# Altium PCB LED-DRIVER.PcbDoc
Units mil, origin at the board's own origin, x right, y up, seen from the top; angles counter-clockwise.
Board outline 2220 x 1060 mil, 2 copper layers (Top Layer, Bottom Layer); 38 components, 32 nets, 104 pads, 4 vias.
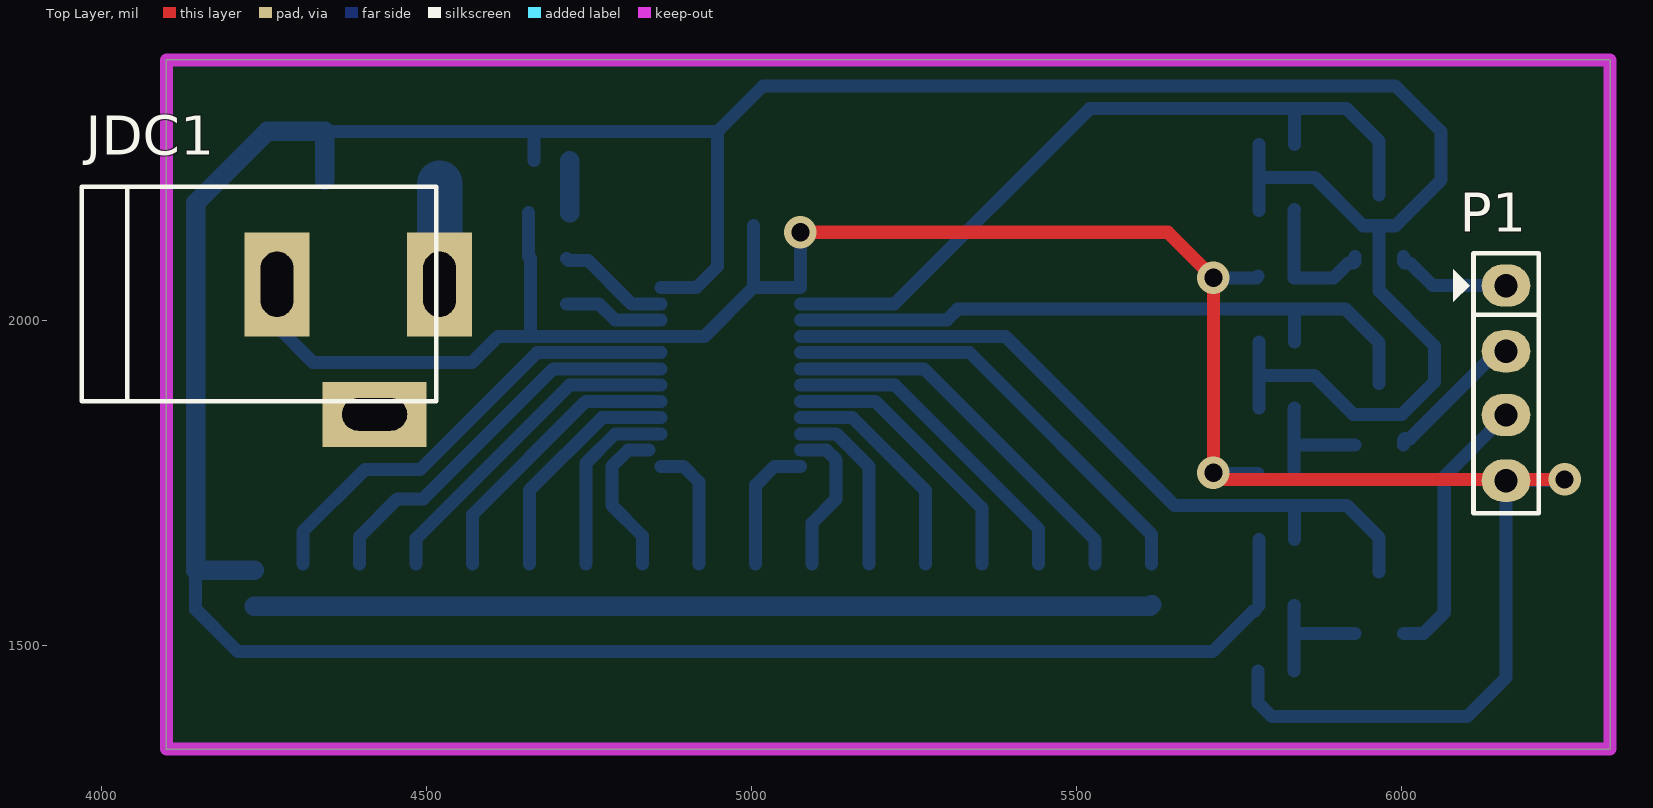
[diagram p0: Top Layer view]
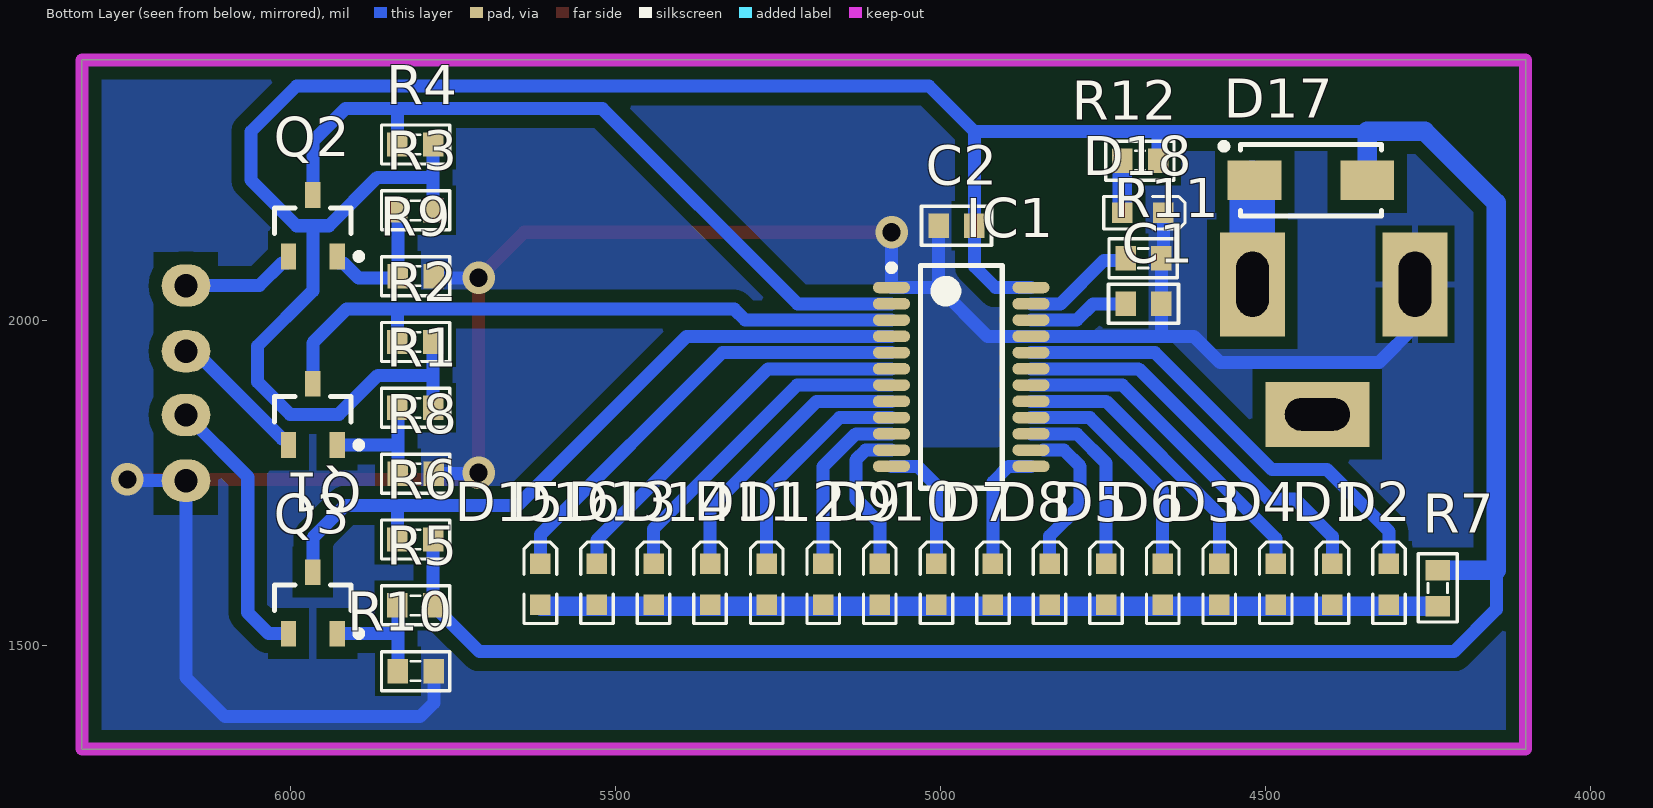
[diagram p1: Bottom Layer view, seen from below]
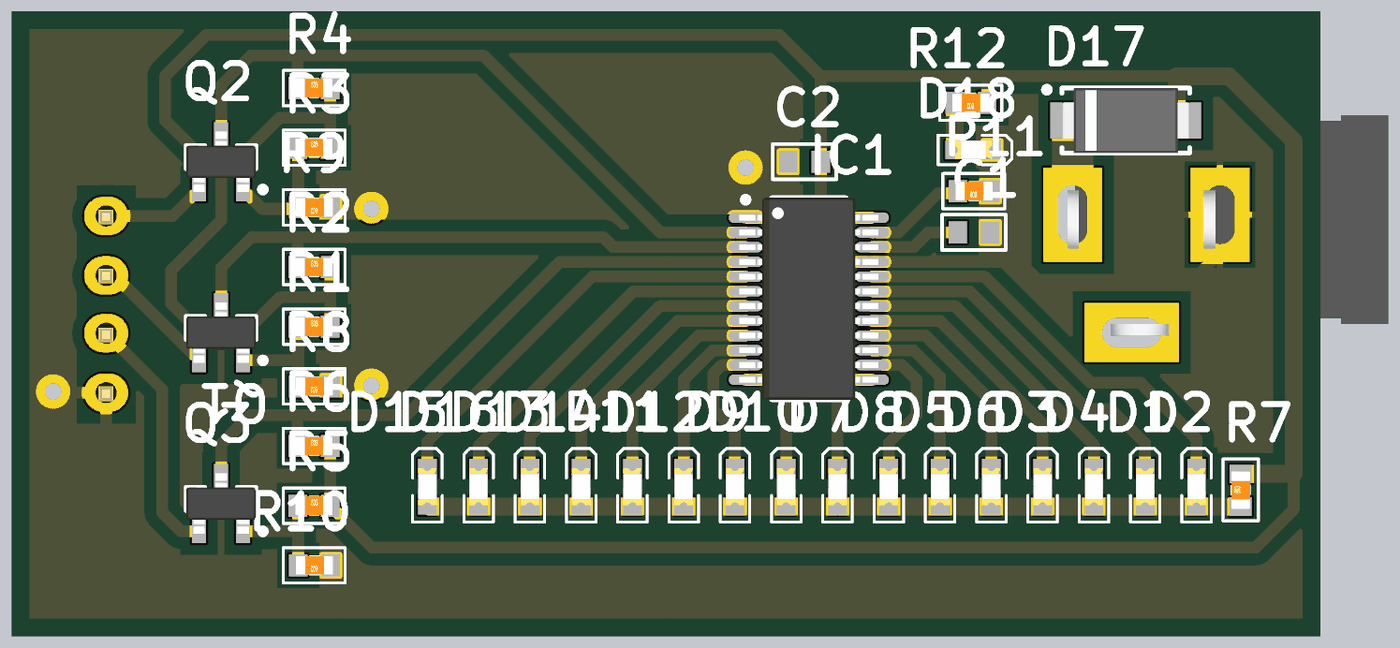
[diagram p2: 3D render of the assembled board from below, using the file's embedded part models]

## Layer stack, top to bottom
Top Solder: solder mask 0.4, Solder Resist, Dk 3.5
Top Layer: signal copper 1.4
Dielectric 1: dielectric 12.6, FR-4, Dk 4.8
Bottom Layer: signal copper 1.4
Bottom Solder: solder mask 0.4, Solder Resist, Dk 3.5

## Board outline
4100,1340 4100,2400 6320,2400 6320,1340

## Design rules (kind name [scope] priority, off if disabled: settings)
Clearance Clearance_13 [InNamedPolygon('GND_L02_P002')] p1: gap=20 ignorepadtopadclearanceinfootprint=FALSE
Clearance Clearance_12 [InNamedPolygon('GND_L02_P002')] p2: gap=15 ignorepadtopadclearanceinfootprint=FALSE
Clearance Clearance_11 [InNamedPolygon('GND_L02_P002')] p3: gap=20 ignorepadtopadclearanceinfootprint=FALSE
Clearance Clearance_10 [InNamedPolygon('NONET_L01_P002')] p4: gap=20 ignorepadtopadclearanceinfootprint=FALSE
Clearance Clearance_9 [InNamedPolygon('GND_L02_P000')] p5: gap=20 ignorepadtopadclearanceinfootprint=FALSE
Clearance Clearance_8 [InNamedPolygon('GND_L02_P000')] p6: gap=15 ignorepadtopadclearanceinfootprint=FALSE
Clearance Clearance_7 [InNamedPolygon('GND_L02_P000')] p7: gap=15 ignorepadtopadclearanceinfootprint=FALSE
Clearance Clearance_6 [InNamedPolygon('NONET_L01_P000')] p8: gap=15 ignorepadtopadclearanceinfootprint=FALSE
Clearance Clearance_5 [InNamedPolygon('GND_L02_P000')] p9: gap=15 ignorepadtopadclearanceinfootprint=FALSE
Clearance Clearance_4 [InNamedPolygon('GND_L02_P000')] p10: gap=15 ignorepadtopadclearanceinfootprint=FALSE
Clearance Clearance_3 [InNamedPolygon('GND_L02_P000')] p11: gap=15 ignorepadtopadclearanceinfootprint=FALSE
Clearance Clearance_2 [InNamedPolygon('GND_L02_P000')] p12: gap=20 ignorepadtopadclearanceinfootprint=FALSE
Clearance Clearance_1 [InNamedPolygon('GND_L02_P000')] p13: gap=10 ignorepadtopadclearanceinfootprint=FALSE
Clearance [All] p14: gap=5 ignorepadtopadclearanceinfootprint=FALSE
PolygonConnect PolygonConnect_9 [All vs IsNamedPolygon('GND_L02_P002')] p1: thpad.connectstyle=Relief thpad.reliefconductorwidth=10 thpad.reliefentries=4 thpad.polygonreliefangle="90 Angle" thpad.airgapwidth=10 smdpad.connectstyle=Direct smdpad.reliefconductorwidth=10 smdpad.reliefentries=4 smdpad.polygonreliefangle="90 Angle" smdpad.airgapwidth=10 via.connectstyle=Direct via.reliefconductorwidth=10 via.reliefentries=4 via.polygonreliefangle="90 Angle" via.airgapwidth=10
PolygonConnect PolygonConnect_8 [All vs IsNamedPolygon('NONET_L01_P002')] p2: thpad.connectstyle=Relief thpad.reliefconductorwidth=10 thpad.reliefentries=4 thpad.polygonreliefangle="90 Angle" thpad.airgapwidth=10 smdpad.connectstyle=Direct smdpad.reliefconductorwidth=10 smdpad.reliefentries=4 smdpad.polygonreliefangle="90 Angle" smdpad.airgapwidth=10 via.connectstyle=Direct via.reliefconductorwidth=10 via.reliefentries=4 via.polygonreliefangle="90 Angle" via.airgapwidth=10
PolygonConnect PolygonConnect_7 [All vs IsNamedPolygon('GND_L02_P000')] p3: thpad.connectstyle=Relief thpad.reliefconductorwidth=10 thpad.reliefentries=4 thpad.polygonreliefangle="90 Angle" thpad.airgapwidth=10 smdpad.connectstyle=Direct smdpad.reliefconductorwidth=10 smdpad.reliefentries=4 smdpad.polygonreliefangle="90 Angle" smdpad.airgapwidth=10 via.connectstyle=Direct via.reliefconductorwidth=10 via.reliefentries=4 via.polygonreliefangle="90 Angle" via.airgapwidth=10
PolygonConnect PolygonConnect_6 [All vs IsNamedPolygon('GND_L02_P000')] p4: thpad.connectstyle=Relief thpad.reliefconductorwidth=10 thpad.reliefentries=4 thpad.polygonreliefangle="90 Angle" thpad.airgapwidth=10 smdpad.connectstyle=Direct smdpad.reliefconductorwidth=10 smdpad.reliefentries=4 smdpad.polygonreliefangle="90 Angle" smdpad.airgapwidth=10 via.connectstyle=Direct via.reliefconductorwidth=10 via.reliefentries=4 via.polygonreliefangle="90 Angle" via.airgapwidth=10
PolygonConnect PolygonConnect_5 [All vs IsNamedPolygon('NONET_L01_P000')] p5: thpad.connectstyle=Relief thpad.reliefconductorwidth=10 thpad.reliefentries=4 thpad.polygonreliefangle="90 Angle" thpad.airgapwidth=10 smdpad.connectstyle=Direct smdpad.reliefconductorwidth=10 smdpad.reliefentries=4 smdpad.polygonreliefangle="90 Angle" smdpad.airgapwidth=10 via.connectstyle=Direct via.reliefconductorwidth=10 via.reliefentries=4 via.polygonreliefangle="90 Angle" via.airgapwidth=10
PolygonConnect PolygonConnect_4 [All vs IsNamedPolygon('GND_L02_P000')] p6: thpad.connectstyle=Relief thpad.reliefconductorwidth=10 thpad.reliefentries=4 thpad.polygonreliefangle="90 Angle" thpad.airgapwidth=10 smdpad.connectstyle=Direct smdpad.reliefconductorwidth=10 smdpad.reliefentries=4 smdpad.polygonreliefangle="90 Angle" smdpad.airgapwidth=10 via.connectstyle=Relief via.reliefconductorwidth=10 via.reliefentries=4 via.polygonreliefangle="90 Angle" via.airgapwidth=10
PolygonConnect PolygonConnect_3 [All vs IsNamedPolygon('GND_L02_P000')] p7: thpad.connectstyle=Relief thpad.reliefconductorwidth=10 thpad.reliefentries=4 thpad.polygonreliefangle="90 Angle" thpad.airgapwidth=10 smdpad.connectstyle=Direct smdpad.reliefconductorwidth=10 smdpad.reliefentries=4 smdpad.polygonreliefangle="90 Angle" smdpad.airgapwidth=10 via.connectstyle=Relief via.reliefconductorwidth=10 via.reliefentries=4 via.polygonreliefangle="90 Angle" via.airgapwidth=10
PolygonConnect PolygonConnect_2 [All vs IsNamedPolygon('GND_L02_P003')] p8: thpad.connectstyle=Direct thpad.reliefconductorwidth=10 thpad.reliefentries=4 thpad.polygonreliefangle="90 Angle" thpad.airgapwidth=10 smdpad.connectstyle=Direct smdpad.reliefconductorwidth=10 smdpad.reliefentries=4 smdpad.polygonreliefangle="90 Angle" smdpad.airgapwidth=10 via.connectstyle=Relief via.reliefconductorwidth=10 via.reliefentries=4 via.polygonreliefangle="90 Angle" via.airgapwidth=10
PolygonConnect PolygonConnect_1 [All vs IsNamedPolygon('GND_L02_P003')] p9: thpad.connectstyle=Direct thpad.reliefconductorwidth=10 thpad.reliefentries=4 thpad.polygonreliefangle="90 Angle" thpad.airgapwidth=10 smdpad.connectstyle=Direct smdpad.reliefconductorwidth=10 smdpad.reliefentries=4 smdpad.polygonreliefangle="90 Angle" smdpad.airgapwidth=10 via.connectstyle=Relief via.reliefconductorwidth=10 via.reliefentries=4 via.polygonreliefangle="90 Angle" via.airgapwidth=10
PolygonConnect [All] p10: connectstyle=Relief reliefconductorwidth=10 reliefentries=4 polygonreliefangle="90 Angle" airgapwidth=10
RoutingVias [All] p1: holewidth=28 width=50 viastyle="Through Hole" minholewidth=28 minwidth=50 maxholewidth=28 maxwidth=50
SolderMaskExpansion [All] p1: expansion=4 istentingtop=FALSE
Width [All] p1: maxlimit=30 minlimit=10 preferedwidth=20
30 further rules are at their usual default settings.

## Components (designator, comment, footprint, x,y, rotation, side; value= is the part's Value field where it differs from the comment)
C1 "Cap Non-Pol SMD" CAP-SM-0603 4687.56,2025 r0 bottom value=10pF/16V
C2 "Cap Non-Pol SMD" CAP-SM-0603 4975,2145 r180 bottom value=0.1uF/16V
D1 "LED SMD" LED_0603_Blue 4397,1593.5 r90 bottom
D2 "LED SMD" LED_0603_Blue 4310,1593.5 r90 bottom
D3 "LED SMD" LED_0603_Blue 4571,1593.5 r90 bottom
D4 "LED SMD" LED_0603_Blue 4484,1593.5 r90 bottom
D5 "LED SMD" LED_0603_Blue 4745,1593.5 r90 bottom
D6 "LED SMD" LED_0603_Blue 4658,1593.5 r90 bottom
D7 "LED SMD" LED_0603_Blue 4919,1593.5 r90 bottom
D8 "LED SMD" LED_0603_Blue 4832,1593.5 r90 bottom
D9 "LED SMD" LED_0603_Blue 5093,1593.5 r90 bottom
D10 "LED SMD" LED_0603_Blue 5006,1593.5 r90 bottom
D11 "LED SMD" LED_0603_Blue 5267,1593.5 r90 bottom
D12 "LED SMD" LED_0603_Blue 5180,1593.5 r90 bottom
D13 "LED SMD" LED_0603_Blue 5441,1593.5 r90 bottom
D14 "LED SMD" LED_0603_Blue 5354,1593.5 r90 bottom
D15 "LED SMD" LED_0603_Blue 5615,1593.5 r90 bottom
D16 "LED SMD" LED_0603_Blue 5528,1593.5 r90 bottom
D17 "D Schottky" SS34 4430,2215 r180 bottom
D18 "LED SMD" LED_0603_Blue 4688.5,2165 r180 bottom
IC1 "MBI5026GP" MBI5026GP 5075,2050 r180 bottom
JDC1 "Jack DC" DC-IN 4395,1955 r0 top value="Jac DC"
P1 "Header 4" JP4 6160,1953 r270 top
Q1 "Si2312BDS" SOT95P245X110-3N 5965,1855 r90 bottom
Q2 "Si2312BDS" SOT95P245X110-3N 5965,2145 r90 bottom
Q3 "Si2312BDS" SOT95P245X110-3N 5965,1565 r90 bottom
R1 "RESISTOR SMD" RES-SM-0603 5834.44,1865 r180 bottom value=4.7K
R2 "RESISTOR SMD" RES-SM-0603 5834.44,1966.25 r180 bottom value=10K
R3 "RESISTOR SMD" RES-SM-0603 5834.44,2168.75 r180 bottom value=4.7K
R4 "RESISTOR SMD" RES-SM-0603 5834.44,2270 r180 bottom value=10K
R5 "RESISTOR SMD" RES-SM-0603 5834.44,1561.25 r180 bottom value=4.7K
R6 "RESISTOR SMD" RES-SM-0603 5834.44,1662.5 r180 bottom value=10K
R7 "RESISTOR SMD" RES-SM-0603 4235,1560.56 r90 bottom value=10K
R8 "RESISTOR SMD" RES-SM-0603 5779.44,1763.75 r0 bottom value=10K
R9 "RESISTOR SMD" RES-SM-0603 5779.44,2067.5 r0 bottom value=10K
R10 "RESISTOR SMD" RES-SM-0603 5779.44,1460 r0 bottom value=10K
R11 "RESISTOR SMD" RES-SM-0603 4660.44,2095 r0 bottom value=1K2
R12 "RESISTOR SMD" RES-SM-0603 4665.44,2245 r0 bottom value=1K

## Footprints (in the part's own frame and the unit in brackets; to place one, negate y for a bottom-side part, rotate by r counter-clockwise, add the part's x,y. Pads: shape width x height; smd on the part's side, far side on the other; paste and mask are expansions set on the pad)
CAP-SM-0603 [mm] "SMD Ceramic Capacitor Size 0603"
  rect 0.8x0.95 smd: 1(-0.7,0) 2(0.7,0)
  silkscreen extent -1.37,-0.76 1.37,0.76, body extent -0.85,-0.45 0.85,0.45, height 0.6
DC-IN [mil] "Jac DC input"
  rect 100x160 hole 50 slot 100 at 90 deg: 1(125,100) 2(-125,100)
  rect 160x100 hole 50 slot 100 at 0 deg: 3(25,-100)
  silkscreen extent -425,-80 120,250, body extent -410,-105 134,269, height 434
JP4 [mil] "Jumper 4"
  oval 65x75 hole 36: 1(-100,0) 2(1,0) 3(99,0) 4(200,0)
  silkscreen extent -150,-81 250,50, body extent -148,-48 248,50, height 323
LED_0603_Blue [mm] "Chip LED, 2-Leads, Body 1.6x0.8mm, IPC Medium Density"
  rect 0.8x0.8 smd: 1(-0.8,0) 2(0.8,0)
  silkscreen extent -1.52,-0.64 1.65,0.64, body extent -0.8,-0.4 0.8,0.4, height 0.7
MBI5026GP [mm] "SOP, 24-Leads, Body 8.66x3.91mm, Pitch 0.64mm, IPC Medium Density"
  oval 1.45x0.45 smd: 1(0,0) 2(0,-0.635) 3(0,-1.27) 4(0,-1.905) 5(0,-2.54) 6(0,-3.175) 7(0,-3.81) 8(0,-4.445) 9(0,-5.08) 10(0,-5.715) 11(0,-6.35) 12(0,-6.985) 13(5.45,-6.985) 14(5.45,-6.35) 15(5.45,-5.715) 16(5.45,-5.08) 17(5.45,-4.445) 18(5.45,-3.81) 19(5.45,-3.175) 20(5.45,-2.54) 21(5.45,-1.905) 22(5.45,-1.27) 23(5.45,-0.635) 24(5.45,0)
  silkscreen extent -0.13,-7.84 4.33,0.9, body extent -0.27,-7.84 5.72,0.86, height 1.63
RES-SM-0603 [mm]
  rect 0.8x0.95 smd: 1(-0.014,0) 2(1.386,0)
  silkscreen extent -0.64,-0.76 2.03,0.76, body extent -0.11,-0.4 1.49,0.4, height 0.3
SOT95P245X110-3N [mm] "SOT23, 3-Leads, Body 2.90x2.45mm, Pitch 0.95mm, IPC Medium Density"
  rect 1x0.6 smd: 1(-1.2,-0.95) 2(-1.2,0.95) 3(1.2,0)
  silkscreen extent -1.32,-1.92 0.7,1.5, body extent -1.3,-1.5 1.3,1.5, height 1.1
SS34 [mm] "DO-214-AC/SMA Molded Diode, Body 5.3x2.6mm, IPC Medium Density"
  rect 2.1x1.55 smd: A(-2.2,0) K(2.2,0)
  silkscreen extent -3.53,-1.4 2.75,1.45, body extent -2.75,-1.4 2.75,1.4, height 2.3

## Part data
C1 C2: "Capacitor"
D1 D2 D3 D4 D5 D6 D7 D8 D9 D10 D11 D12 D13 D14 D15 D16 D18: "LED"
D17: "Schottky Diode", Supplier Part Number 1=SS14, Code_JEDEC=DO-214-AA, LatestRevisionDate=17-Jul-2002, LatestRevisionNote="Re-released for DXP Platform.", PackageDescription="DO-214-AA/SMB; 2 C-Bend Leads; Body 5.3 x 3.6 mm, inc. leads (LxW)", PackageReference=SMB, Published=8-Jun-2000, Publisher="Altium Limited", Supplier 1="Arrow Electronics", Supplier 2=RSComponents, Supplier Part Number 2=8080433
IC1: "16-bit Constant Current LED Sink Driver"
JDC1: "Jack DC input"
P1: "Header, 4-Pin", LatestRevisionDate=17-Jul-2002, LatestRevisionNote="Re-released for DXP Platform.", Publisher="Altium Limited"
Q1 Q2 Q3: Manufacturer="Vishay Semiconductors", Manufacturer P/N=SI2312BDS-T1-E3, ComponentLink1Description="Supplier 1 Link", ComponentLink1URL=https://www.mouser.vn/ProductDetail/Vishay-Semiconductors/SI2312BDS-T1-E3/?qs=%2Fha2pyFaduiZW8HKJbgU3%2FZCFULz2JfGTitrLvt62%2FLefe%252B0DX8Hbw%3D%3D, Supplier 1=Mouser, Supplier 1 P/N=781-SI2312BDS-E3
R1 R2 R3 R4 R5 R6 R7 R8 R9 R10 R11 R12: "Resistor"

## Via types
v1: diameter 50, hole 28, Top Layer to Bottom Layer, 4 vias

## Nets (pads, with @x,y where several pads share a name; then routed paths per layer and width w, separated by ;. In a path a pad name is that pad's centre, name@x,y a point inside that pad or via, vN(x,y) a via of type N, cw(c..) or ccw(c..) an arc to the next point about the centre after c; other vN are vias at no path point)
+5: C2.2 D17.K IC1.24 R1.2 R2.2 R3.2 R4.2 R5.2 R6.2 R7.2 R12.1 | length 6153.1
  Bottom Layer w20: 4145,1615.12 4145,1555 4210,1490 5708.63,1490 5771.18,1552.55 R5.2@5774.13,1552.55 ; 4343.39,2290 4664.88,2290 ; R12.1 4664.88,2290 ; IC1.24 4915,2050 4947.44,2082.44 C2.2 4947.44,2290 ; R5.2 R6.2 ; R1.2 5779.88,1915 ; R2.2 5779.88,1915 ; R3.2 5779.88,2219.38 ; R4.2 5779.88,2219.38 ; 4664.88,2290 4947.44,2290 ; 4947.44,2290 5017.44,2360 5990,2360 6060,2290 6060,2215 5990,2145 5965,2145 ; 5779.88,1915 5865,1915 5925,1855 6000,1855 6050,1905 6050,1960 5965,2045 5965,2145 ; 5779.88,2219.38 5865.62,2219.38 5940,2145 5965,2145
  Bottom Layer w30: R7.2 4145,1615.12 4145,2180 4255,2290 4343.39,2290 D17.K
CLK: IC1.3 Q1.3 R2.1 | length 1031.6
  Bottom Layer w20: IC1.3 5300,2000 5316.72,2016.72 5835,2016.72 ; R2.1 5835,2016.72 ; Q1.3 5965,1965 5913.28,2016.72 5835,2016.72
DATA: IC1.2 Q2.3 R4.1 | length 1172.7
  Bottom Layer w20: IC1.2 5219.64,2025 5519.64,2325 5835,2325 ; R4.1 5835,2325 ; Q2.3 5965,2275 5915,2325 5835,2325
GND: C1.1 C2.1 D18.2 IC1.1 IC1.21 JDC1.2 P1.4 R8.1 R9.1 R10.1 R11.1 | length 3781.5
  Top Layer w20: v1(5075,2135) 5640,2135 v1(5710,2065) v1(5710,1765) 5718.12,1765 5728.12,1755 v1(6250,1755)
  Bottom Layer w20: JDC1.2@4270,2020 4270,1990 4325,1935 4570,1935 4610,1975 4660,1975 ; D18.2 4657.01,2097.87 R11.1 4660,2094.88 C1.1 4660,1975 ; C2.1 5002.56,2050 ; v1(5075,2135) IC1.1 5002.56,2050 ; v1(5710,1765) 5711.25,1763.75 R8.1 ; v1(5710,2065) 5776.38,2065 R9.1 ; R10.1 5778.88,1411.12 5800,1390 6100,1390 6160,1450 P1.4 6248,1753 v1(6250,1755) ; 4660,1975 IC1.21 4927.56,1975 5002.56,2050
LATCH: IC1.4 Q3.3 R6.1 | length 1123.7
  Bottom Layer w20: IC1.4 5390,1975 5650,1715 5835,1715 ; R6.1 5835,1715 ; Q3.3 5965,1665 5915,1715 5835,1715
LED1: D15.2 IC1.5 | length 701
  Bottom Layer w20: IC1.5 5335,1950 5615,1670 D15.2
LED2: D16.2 IC1.6 | length 598.9
  Bottom Layer w20: IC1.6 5265,1925 5528,1662 D16.2
LED3: D13.2 IC1.7 | length 511.5
  Bottom Layer w20: IC1.7 5220,1900 5441,1679 D13.2
LED4: D14.2 IC1.8 | length 432.9
  Bottom Layer w20: IC1.8 5190,1875 5354,1711 D14.2
LED5: D11.2 IC1.9 | length 351.4
  Bottom Layer w20: IC1.9 5155,1850 5267,1738 D11.2
LED6: D12.2 IC1.10 | length 275.7
  Bottom Layer w20: IC1.10 5130,1825 5180,1775 D12.2
LED7: D9.2 IC1.11 | length 236.5
  Bottom Layer w20: IC1.11 5115,1800 5130,1785 5130,1725 5093,1688 D9.2
LED8: D10.2 IC1.12 | length 202
  Bottom Layer w20: D10.2 5006,1746 5035,1775 IC1.12
LED9: D7.2 IC1.13 | length 194.5
  Bottom Layer w20: IC1.13 4895,1775 4919,1751 D7.2
LED10: D8.2 IC1.14 | length 236.6
  Bottom Layer w20: D8.2 4832,1668 4785,1715 4785,1775 4809.82,1799.82 IC1.14@4841.89,1799.82
LED11: D5.2 IC1.15 | length 289.1
  Bottom Layer w20: D5.2 4745,1780 4789.82,1824.82 4841.89,1824.82 4842.07,1825 IC1.15
LED12: D6.2 IC1.16 | length 361.8
  Bottom Layer w20: D6.2 4658,1738 4770,1850 IC1.16
LED13: D3.2 IC1.17 | length 437.5
  Bottom Layer w20: D3.2 4571,1701 4745,1875 IC1.17
LED14: D4.2 IC1.18 | length 513.2
  Bottom Layer w20: D4.2 4484,1664 4720,1900 IC1.18
LED15: D1.2 IC1.19 | length 612.3
  Bottom Layer w20: D1.2 4397,1667 4455,1725 4495,1725 4695,1925 IC1.19
LED16: D2.2 IC1.20 | length 714.3
  Bottom Layer w20: D2.2 4310,1675 4405,1770 4490,1770 4670,1950 IC1.20
mCLK: P1.2 Q1.2 | length 222
  Bottom Layer w20: Q1.2 6002.4,1815.63 6004.21,1817.44 6012.09,1817.44 6146.65,1952 P1.2
mDATA: P1.1 Q2.2 | length 180.7
  Bottom Layer w20: Q2.2 6002.4,2089.88 6004.21,2088.07 6012.09,2088.07 6047.16,2053 P1.1
mLATCH: P1.3 Q3.2 | length 419.3
  Bottom Layer w20: Q3.2 6032.76,1517.76 6065,1550 6065,1759 P1.3
NetC1_2: C1.2 IC1.22 | length 155.7
  Bottom Layer w20: C1.2 4765,2025 4790,2000 IC1.22
NetD1_1: D1.1 D2.1 D3.1 D4.1 D5.1 D6.1 D7.1 D8.1 D9.1 D10.1 D11.1 D12.1 D13.1 D14.1 D15.1 D16.1 R7.1 | length 1380.8
  Bottom Layer w30: R7.1 4919,1560 5612.99,1560 D15.1
NetD17_A: D17.A JDC1.1 | length 162.1
  Bottom Layer w30: D17.A@4520,2210 D17.A@4525,2215
  Bottom Layer w70: JDC1.1 D17.A@4520,2210
NetD18_1: D18.1 R12.2 | length 80
  Bottom Layer w30: D18.1 R12.2
NetIC1_23: IC1.23 R11.2 | length 174.4
  Bottom Layer w20: R11.2 4718.44,2091.56 4748.44,2091.56 4815,2025 IC1.23
NetQ1_1: Q1.1 R1.1 R8.2 | length 197.8
  Bottom Layer w20: R8.2 5834,1813.88 ; R1.1 5834,1864 5834,1813.88 ; Q1.1 5840.12,1807.76 5834,1813.88
NetQ2_1: Q2.1 R3.1 R9.2 | length 216.9
  Bottom Layer w20: R3.1@5835,2169.75 5834,2168.75 R9.2 5834,2065 5894.84,2065 5917.91,2088.07 5925.79,2088.07 5927.6,2089.88 Q2.1
NetQ3_1: Q3.1 R5.1 R10.2 | length 196
  Bottom Layer w20: R10.2 5834,1517.76 ; R5.1@5834,1561.25 R5.1@5834.5,1560.75 ; R5.1 5834,1560.25 5834,1517.76 ; Q3.1 5834,1517.76
pads on no net: JDC1.3

## Polygon pours and split planes (outlines as drawn)
GND on Bottom Layer "GND_L02_P002" (solid, remove dead copper, pour order 2): 4100,1340 4100,2400 6320,2400 6320,1340

## Keep-outs
Keep-Out Layer:
  the board outline again, w20

## Other copper
Bottom Layer:
  pour cut-out: 4909.01,1801.67 4911.39,1804.05 5026.74,1804.05 4985,1762.31 4985,1585 4945,1585
  pour cut-out: 6110,2105 6210,2105 6210,1700 6110,1700